# EAGLE board eTapper1main56 (EAGLE 8.6.3)
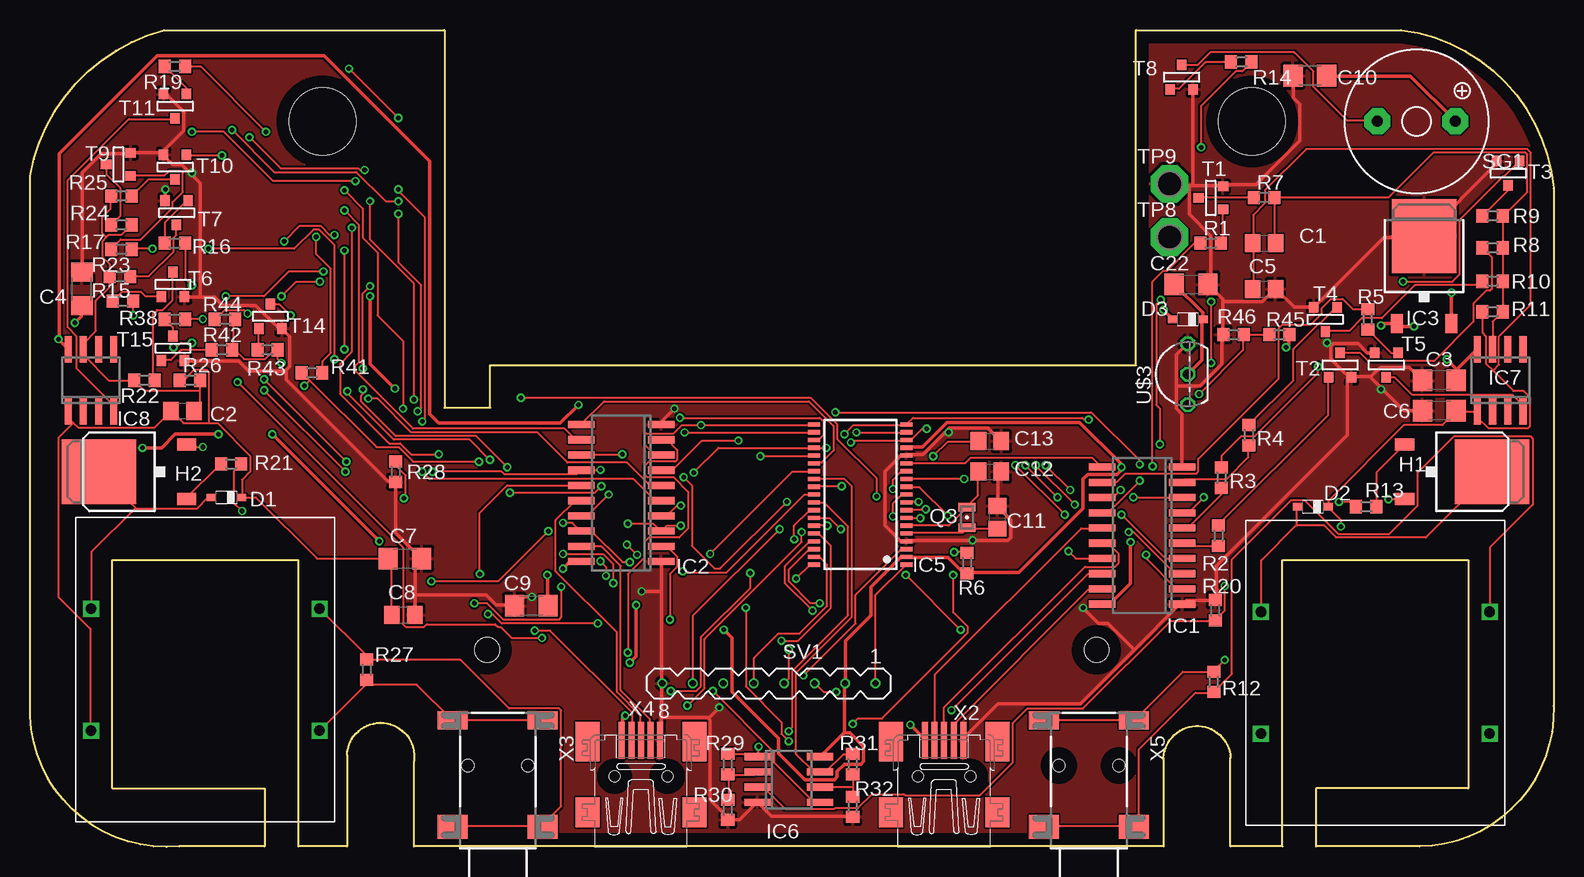
[diagram p0: board, top side]
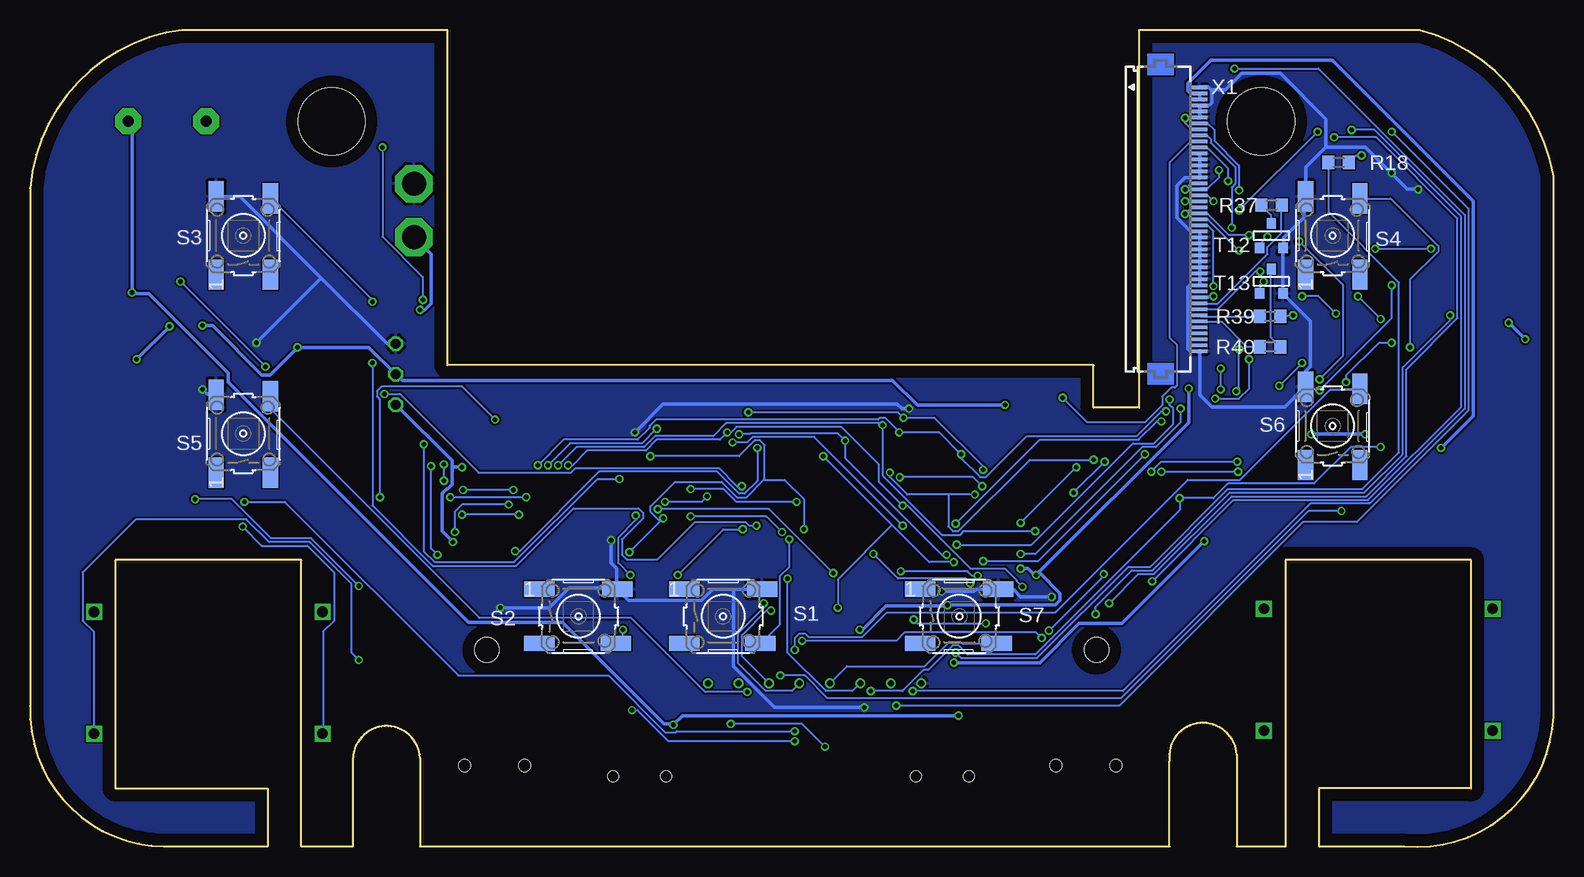
[diagram p1: board, bottom side, seen from below]

Size 127 x 68.12 mm. Coordinates in mm from the lower left corner, seen from the top.
Outline: 104.4,23.93 119.89,23.93 119.89,4.88 107.19,4.88 107.19,0.05 115.83,0.05 arc91 127,11.73 127,54.91 arc78 114.3,68.12 92.21,68.12 92.21,40.18 38.36,40.18 38.36,36.63 34.55,36.63 34.55,68.12 11.18,68.12 arc65 0,55.93 0,11.99 arc98 12.45,0.05 19.56,0.05 19.56,4.88 6.86,4.88 6.86,23.93 22.36,23.93 22.36,0.05 26.42,0.05 26.42,7.67 arc-185 32.01,7.16 32.01,0.05 94.49,0.05 94.49,7.42 arc-175 100.08,7.42 100.08,0.05 104.4,0.05 104.4,23.93
Copper layers (1*16): Top 0.035mm / dielectric 30mil / Bottom 0.035mm
Design rules "default *": minimum track width 6mil, minimum drill 15mil, track to track 6mil, track to pad 6mil, pad to pad 6mil, via to via 6mil, smd to smd 6mil, copper to edge 40mil, drill to drill 6mil, minimum pad ring 6mil, minimum via ring 6mil, stop-mask expansion 4mil, vias tented up to drill 0mil, thermal gap 10mil
Net classes: 1 GND: width 0.305 mm, clearance 0.152 mm; 2 BAT+: width 0.305 mm, clearance 0.152 mm; 3 +9V: width 0.305 mm, clearance 0.152 mm; 4 +3V: width 0.305 mm, clearance 0.152 mm; 5 VCC: width 0.305 mm, clearance 0.152 mm
Holes 5.59 mm at 24.39,60.5 101.86,60.5
Holes 2.03 mm at 38.1,16.43 88.9,16.43

## Footprints (pad centres in the part's own frame; a part is rotated, then mirrored left to right if it is on the bottom)
C0805 = smd 1.3 x 1.5: 1 -0.95,0; 2 0.95,0
C1206 = smd 1.6 x 1.8: 1 -1.4,0; 2 1.4,0
SOD323_ST = smd 0.8 x 0.6: A 1.25,0; C -1.25,0
XFMR = drill 0.889 square: P$1 -10.16,5.08; P$2 -10.16,-5.08; P$3 8.89,5.08; P$4 8.89,-5.08
D-PAK_TO252AA = smd 1 x 1.6: 1 -2.28,-4.8; 3 2.28,-4.8 | smd 5.4 x 6.2: 4 0,2.5
SO20 = smd 0.6 x 2.2: 1 -5.715,-3.33; 2 -4.445,-3.33; 3 -3.175,-3.33; 4 -1.905,-3.33; 5 -0.635,-3.33; 6 0.635,-3.33; 7 1.905,-3.33; 8 3.175,-3.33; 9 4.445,-3.33; 10 5.715,-3.33; 11 5.715,3.33; 12 4.445,3.33; 13 3.175,3.33; 14 1.905,3.33; 15 0.635,3.33; 16 -0.635,3.33; 17 -1.905,3.33; 18 -3.175,3.33; 19 -4.445,3.33; 20 -5.715,3.33
TO252 = smd 1 x 1.6: 1 -2.28,-4.8; 3 2.28,-4.8 | smd 5.4 x 6.2: 2 0,2.5
TSSOP38_R-PDSO-G38-DA = smd 0.35 x 1: 1 -5.85,-3.85; 2 -5.2,-3.85; 3 -4.55,-3.85; 4 -3.9,-3.85; 5 -3.25,-3.85; 6 -2.6,-3.85; 7 -1.95,-3.85; 8 -1.3,-3.85; 9 -0.65,-3.85; 10 0,-3.85; 11 0.65,-3.85; 12 1.3,-3.85; 13 1.95,-3.85; 14 2.6,-3.85; 15 3.25,-3.85; 16 3.9,-3.85; 17 4.55,-3.85; 18 5.2,-3.85; 19 5.85,-3.85; 20 5.85,3.85; 21 5.2,3.85; 22 4.55,3.85; 23 3.9,3.85; 24 3.25,3.85; 25 2.6,3.85; 26 1.95,3.85; 27 1.3,3.85; 28 0.65,3.85; 29 0,3.85; 30 -0.65,3.85; 31 -1.3,3.85; 32 -1.95,3.85; 33 -2.6,3.85; 34 -3.25,3.85; 35 -3.9,3.85; 36 -4.55,3.85; 37 -5.2,3.85; 38 -5.85,3.85
SO8 = smd 0.6 x 2.2: 1 -1.905,-2.6; 2 -0.635,-2.6; 3 0.635,-2.6; 4 1.905,-2.6; 5 1.905,2.6; 6 0.635,2.6; 7 -0.635,2.6; 8 -1.905,2.6
SO08 = smd 0.6 x 2.2: 1 -1.905,-2.6; 2 -0.635,-2.6; 3 0.635,-2.6; 4 1.905,-2.6; 5 1.905,2.6; 6 0.635,2.6; 7 -0.635,2.6; 8 -1.905,2.6
FC-12M = smd 0.7 x 1.4: 1 -0.85,0; 2 0.85,0
R0603 = smd 1 x 1.1: 1 -0.85,0; 2 0.85,0
B3F-10XX = smd 2.54 x 1.27: 1 -3.251,2.261; 2 3.251,2.261; 3 -3.251,-2.261; 4 3.099,-2.261
F/QMBIII = drill 0.914 pad 2.159 octagon: + 3.251,0; - -3.251,0
MA08-1 = drill 0.508: 1 -8.89,0; 2 -6.35,0; 3 -3.81,0; 4 -1.27,0; 5 1.27,0; 6 3.81,0; 7 6.35,0; 8 8.89,0
SOT-23 = smd 0.787 x 0.889: 1 0.025,-1.016; 2 -0.94,1.016; 3 0.991,1.016
P1-20 = drill 2.007 pad 3.15 octagon: TP 0,0
TO92- = drill 0.813 octagon: 1 -1.27,1.27; 2 1.27,1.27; 3 3.81,1.27
FH12-45S-0.5SH = smd 0.3 x 1.3: 1 -13,3.25; 2 -12.5,3.25; 3 -12,3.25; 4 -11.5,3.25; 5 -11,3.25; 6 -10.5,3.25; 7 -10,3.25; 8 -9.5,3.25; 9 -9,3.25; 10 -8.5,3.25; 11 -8,3.25; 12 -7.5,3.25; 13 -7,3.25; 14 -6.5,3.25; 15 -6,3.25; 16 -5.5,3.25; 17 -5,3.25; 18 -4.5,3.25; 19 -4,3.25; 20 -3.5,3.25; 21 -3,3.25; 22 -2.5,3.25; 23 -2,3.25; 24 -1.5,3.25; 25 -1,3.25; 26 -0.5,3.25; 27 0,3.25; 28 0.5,3.25; 29 1,3.25; 30 1.5,3.25; 31 2,3.25; 32 2.5,3.25; 33 3,3.25; 34 3.5,3.25; 35 4,3.25; 36 4.5,3.25; 37 5,3.25; 38 5.5,3.25; 39 6,3.25; 40 6.5,3.25; 41 7,3.25; 42 7.5,3.25; 43 8,3.25; 44 8.5,3.25; 45 9,3.25
32005-201 = smd 3.1 x 0.5: 1 3,1.6; 2 3,0.8; 3 3,0; 4 3,-0.8; 5 3,-1.6 | smd 2.5 x 2: M1 -3,-4.45; M2 -3,4.45 | smd 3.3 x 2: M3 2.9,4.45; M4 2.9,-4.45 | hole 0.9: 0,2.2; 0,-2.2
1503_02 = smd 2.5 x 1.5: 1 -3.75,-10.75; 4 3.75,-10.75 | smd 2.5 x 2: 2 -3.75,-1.9; 3 3.75,-1.9 | hole 1: -2.5,-7; 2.5,-7

## Placement (x,y rotation side)
C1  .01uF  [C0805]  102.87,50.34 0 top
C2  .01uF  [C0805]  12.7,36.37 0 top
C3  3.3 UF  [C1206]  117.48,38.91 180 top
C4  3.3 uF  [C1206]  4.32,46.53 90 top
C5  3.3uF  [C0805]  102.87,46.53 0 top
C6  220uF  [C1206]  117.48,36.37 180 top
C7  220uF  [C1206]  31.25,24.05 0 top
C8  3.3uF  [C0805]  31.12,19.35 0 top
C9  47uF  [C1206]  41.79,20.12 180 top
C10  47uF  [C1206]  106.68,64.31 180 top
C11  12pF  [C0805]  80.65,27.48 90 top
C12  12pF  [C0805]  80.01,31.29 0 top
C13  1 uF  [C0805]  80.01,33.83 0 top
C22  220uF  [C1206]  96.78,46.91 0 top
D1  BAT60J  [SOD323_ST]  16.39,29.13 180 top
D2  BAT60J  [SOD323_ST]  106.94,28.37 180 top
D3  BAT60J  [SOD323_ST]  96.52,43.99 180 top
DRILEGEND  [DRILEGEND]  -4.57,-8.42 0 top  (outside the outline)
F1  XFMR  [XFMR]  112.78,14.53 0 top
F2  XFMR  [XFMR]  15.24,14.78 0 top
H1  IRLR024N  [D-PAK_TO252AA]  119.38,31.29 270 top
H2  IRLR024N  [D-PAK_TO252AA]  8.26,31.29 90 top
IC1  74AC373  [SO20]  92.71,25.96 90 top
IC2  74AC373  [SO20]  49.28,29.51 90 top
IC3  LM2936DT-5.0  [TO252]  116.21,48.44 0 top
IC5  MSP430F2232IDA  [TSSOP38_R-PDSO-G38-DA]  69.22,29.39 90 top
IC6  AD8620R  [SO8]  63.25,5.64 270 top
IC7  LP2951M  [SO08]  122.56,38.91 0 top
IC8  LP2951M  [SO08]  5.08,38.91 0 top
Q3  FC-12M  [FC-12M]  78.11,27.48 90 top
R1  47K  [R0603]  98.43,50.34 0 top
R2  47K  [R0603]  99.06,25.96 90 top
R3  47K  [R0603]  99.32,30.78 90 top
R4  47K  [R0603]  101.6,34.34 90 top
R5  47K  [R0603]  111.51,43.99 270 top
R6  47K  [R0603]  78.11,23.67 270 top
R7  1K  [R0603]  102.87,54.15 0 top
R8  3K  [R0603]  121.92,49.96 0 top
R9  6K  [R0603]  121.92,52.63 0 top
R10  12K  [R0603]  121.92,47.17 0 top
R11  3K  [R0603]  121.92,44.63 0 top
R12  51K  [R0603]  98.68,13.77 90 top
R13  1K  [R0603]  111.38,28.37 0 top
R14  1K  [R0603]  100.97,65.45 180 top
R15  47K  [R0603]  7.75,45.52 180 top
R16  47K  [R0603]  12.07,50.34 180 top
R17  47K  [R0603]  7.62,49.83 180 top
R18  47K  [R0603]  17.91,57.07 0 bottom
R19  47K  [R0603]  12.07,65.07 180 top
R20  5 ohm  [R0603]  98.81,19.73 90 top
R21  1K  [R0603]  16.77,31.93 180 top
R22  1K  [R0603]  9.53,38.91 180 top
R23  3K  [R0603]  7.5,47.55 180 top
R24  6K  [R0603]  7.62,51.87 0 top
R25  12K  [R0603]  7.62,54.28 180 top
R26  3K  [R0603]  13.34,38.91 0 top
R27  51K  [R0603]  28.07,14.78 270 top
R28  5 ohm  [R0603]  30.48,31.29 270 top
R29  50K  [R0603]  58.17,6.91 90 top
R30  10K  [R0603]  58.17,3.1 90 top
R31  50K  [R0603]  68.58,6.91 90 top
R32  10K  [R0603]  68.58,3.35 90 top
R37  100  [R0603]  23.5,53.52 0 bottom
R38  100  [R0603]  12.07,43.99 0 top
R39  100  [R0603]  23.63,44.25 180 bottom
R40  100  [R0603]  23.63,41.71 180 bottom
R41  47K  [R0603]  23.5,39.55 0 top
R42  47K  [R0603]  16.01,41.45 180 top
R43  47K  [R0603]  19.82,41.45 180 top
R44  47K  [R0603]  16.26,43.99 180 top
R45  47K  [R0603]  104.14,42.72 0 top
R46  10K  [R0603]  100.33,42.72 0 top
S1  [B3F-10XX]  69.22,19.23 0 bottom
S2  [B3F-10XX]  81.28,19.23 0 bottom
S3  [B3F-10XX]  109.22,50.98 90 bottom
S4  [B3F-10XX]  18.42,50.98 90 bottom
S5  [B3F-10XX]  109.22,34.47 90 bottom
S6  [B3F-10XX]  18.42,35.1 90 bottom
S7  [B3F-10XX]  49.53,19.23 0 bottom
SG1  F/QMBIII  [F/QMBIII]  115.57,60.5 0 top
SV1  100mil  [MA08-1]  61.6,13.64 180 top
T1  2N3904  [SOT-23]  98.43,54.15 270 top
T2  2N3904  [SOT-23]  109.22,40.18 180 top
T3  2N3904  [SOT-23]  123.19,56.18 0 top
T4  2N3904  [SOT-23]  107.95,43.99 0 top
T5  2N3904  [SOT-23]  113.03,40.18 0 top
T6  2N3904  [SOT-23]  11.94,46.91 180 top
T7  2N3904  [SOT-23]  12.2,52.88 0 top
T8  2N3904  [SOT-23]  96.02,64.18 180 top
T9  2N3904  [SOT-23]  7.37,56.95 270 top
T10  2N3904  [SOT-23]  12.07,56.69 0 top
T11  2N3904  [SOT-23]  12.07,61.77 0 top
T12  2N3904  [SOT-23]  23.5,50.98 180 bottom
T13  2N3904  [SOT-23]  23.5,47.17 180 bottom
T14  2N3904  [SOT-23]  20.07,44.25 180 top
T15  2N3904  [SOT-23]  11.94,41.58 180 top
TP8  TPSPAD1-20  [P1-20]  95,50.85 0 top
TP9  TPSPAD1-20  [P1-20]  95,55.29 0 top
U$3  MCP1702  [TO92-]  95.25,40.69 270 top
X1  FH12-45S-0.5SH  [FH12-45S-0.5SH]  32.77,50.34 270 bottom
X2  MINI-USB-SCHIELD-32005-201  [32005-201]  76.2,5.89 90 top
X3  1503_02A  [1503_02]  38.99,-0.2 180 top
X4  MINI-USB-SCHIELD-32005-201  [32005-201]  50.93,5.89 90 top
X5  1503_02A  [1503_02]  88.27,-0.2 180 top

## Library data of the parts
C1-C13 C22 = rcl; SPICEPREFIX: C
D1-D3 = diode
DRILEGEND = drilegend
F1 F2 = XFMR1
H1 H2 = IRLR024N
IC1 IC2 = 74373_SO20
IC3 = national-semiconductor; MF: NATIONAL SEMICONDUCTOR; MPN: LM2936DT-5.0/NOPB; OC_FARNELL: 1286864; OC_NEWARK: 41K4501
IC5 = texas; MPN: MSP430F2232IDA; OC_FARNELL: 1610178; OC_NEWARK: 28M6312
IC6 = analog-devices; MF: ALTERA CORPORATION; MPN: AD8620ARZ; OC_FARNELL: 9994386; OC_NEWARK: 59K6972
IC7 IC8 = national-semiconductor; MF: FAIRCHILD SEMICONDUCTOR; MPN: LP2951CM; OC_FARNELL: 9488561; OC_NEWARK: 78K6014
Q3 = crystal
R1-R32 R37-R46 = resistor
S1-S7 = switch-omron; MPN: B3F-1000; OC_FARNELL: 176432; OC_NEWARK: 36M3542
SG1 = buzzer; OC_FARNELL: unknown; OC_NEWARK: unknown
SV1 = eTapper1main39; OC_FARNELL: unknown; OC_NEWARK: unknown
T1-T15 = zetex; MPN: DSS20201L-7; OC_FARNELL: 1710688; OC_NEWARK: 25R4555
TP8 TP9 = testpad
U$3 = mcp1702
X1 = con-hirose; OC_FARNELL: unknown; OC_NEWARK: unknown
X2 X4 = con-cypressindustries; OC_FARNELL: unknown; OC_NEWARK: unknown
X3 X5 = 1503_02Astereojacks

## Nets
+3V [+3V]: C9.1 IC1.20 IC2.20 IC5.2 IC5.16 IC6.8 R6.2 SV1.2 U$3.3 X1.2 X1.3 X1.36
+9V [+9V]: C3.1 C4.1 C22.1 D3.C IC3.1 IC7.8 IC8.8 R45.2 U$3.2
/LCS: IC5.8 X1.8
/RST: C13.1 IC5.7 R6.1 SV1.7
BAT+ [BAT+]: D3.A TP8.TP
GND [GND]: C3.2 C4.2 C5.2 C6.2 C7.2 C8.2 C9.2 C10.2 C11.2 C12.2 C13.2 C22.2 IC1.1 IC1.10 IC2.1 IC2.10 IC3.2 IC5.4 IC5.15 IC6.4 R20.2 R28.2 R30.1 R32.1 R46.1 S1.2 S2.2 S3.2 S4.2 S5.2 S6.2 S7.2 SV1.8 T1.2 T2.2 T3.2 T4.2 T5.2 T6.2 T7.2 T8.2 T9.2 T10.2 T11.2 T12.2 T13.2 T14.2 T15.2 TP9.TP U$3.1 X1.1 X1.4 X1.5 X1.6 X1.12 X1.13 X1.14 X1.15 X1.16 X1.25 X1.26 X1.27 X1.28 X1.29 X1.30 X1.31 X1.32 X1.33 X1.34 X1.45 X2.5 X4.5
IO1_0: IC5.31 S1.4
IO1_1: IC5.32 S2.4
IO1_2: IC5.33 S3.4
IO1_3: IC5.34 S4.4
IO4_0: IC1.3 IC2.3 IC5.17 X1.17
IO4_1: IC1.4 IC2.4 IC5.18 X1.18
IO4_2: IC1.7 IC2.7 IC5.19 X1.19
IO4_3: IC1.8 IC2.8 IC5.20 X1.20
IO4_4: IC1.13 IC2.13 IC5.21 X1.21
IO4_5: IC1.14 IC2.14 IC5.22 X1.22
IO4_6: IC1.17 IC2.17 IC5.23 X1.23
IO4_7: IC1.18 IC2.18 IC5.24 X1.24
LADC: IC5.11 IC6.1 R29.2
LCLOCK: IC1.16 X2.3
LCLR: IC1.19 X2.4
LD_/C: IC5.29 X1.9
LDIN: IC1.15 X2.2
LEDK1: R37.2 X1.37
LEDK2: R38.2 X1.38
LEDK3: R39.2 X1.39
LEDK4: R40.2 X1.40
LHVTRIG: IC5.30 R13.1
LLED: IC5.13 R41.1 R42.1 R43.1 R44.1
LNC1: X1.41
LNC2: X1.42
LNC3: X1.43
LNC4: X1.44
LOPA: H1.3 IC6.3 R20.1
LRD: IC5.10 X1.11
LRESET: IC5.26 X1.7
LSDO: X1.35
LTS+: F1.P$4 R12.2 X5.1 X5.4
LTS-: F1.P$3 R12.1 X5.2 X5.3
LVSEL: IC1.11 IC5.14
LWR: IC5.9 X1.10
N$1: IC1.2 R1.1
N$2: IC1.5 R2.1
N$3: IC1.6 R3.1
N$4: IC1.9 R4.1
N$5: IC1.12 R5.1
N$6: SG1.- T8.1
N$7: R4.2 T4.3
N$8: R5.2 T5.3
N$9: D2.A F1.P$1 H1.4
N$10: R7.1 T1.1
N$11: R8.1 T2.1
N$12: R9.1 T3.1
N$13: R1.2 T1.3
N$14: R2.2 T2.3
N$15: R3.2 T3.3
N$16: R10.1 T4.1
N$17: C1.2 IC7.7 R7.2 R8.2 R9.2 R10.2 R11.2
N$18: C1.1 C5.1 C6.1 D2.C F1.P$2 IC7.1 R11.1
N$19: D1.A F2.P$1 H2.4
N$20: IC2.2 R15.1
N$21: H1.1 R13.2
N$22: R14.2 T8.3
N$24: IC2.5 R16.1
N$25: IC2.6 R17.1
N$26: IC2.9 R18.1
N$27: IC2.12 R19.1
N$28: R44.2 T13.3
N$29: R15.2 T6.3
N$30: R16.2 T7.3
N$31: R17.2 T9.3
N$32: R18.2 T10.3
N$33: R19.2 T11.3
N$35: R22.1 T6.1
N$36: R23.1 T7.1
N$37: R24.1 T9.1
N$38: R25.1 T10.1
N$39: C2.2 IC8.7 R22.2 R23.2 R24.2 R25.2 R26.2
N$40: C2.1 C7.1 C8.1 D1.C F2.P$2 IC8.1 R26.1
N$41: R37.1 T12.1
N$42: H2.1 R21.2
N$43: R38.1 T15.1
N$44: R39.1 T14.1
N$45: IC7.4 T5.1
N$46: R40.1 T13.1
N$47: IC8.4 T11.1
N$48: R43.2 T14.3
N$49: R41.2 T12.3
N$50: R42.2 T15.3
N$52: IC6.6 R31.1 R32.2
N$54: IC6.2 R29.1 R30.2
RADC: IC5.27 IC6.7 R31.2
RCLOCK: IC2.16 X4.3
RCLR: IC2.19 X4.4
RDIN: IC2.15 X4.2
RHVTRIG: IC5.3 R21.1
ROPA: H2.3 IC6.5 R28.1
RTS+: F2.P$4 R27.2 X3.1 X3.4
RTS-: F2.P$3 R27.1 X3.2 X3.3
RVSEL: IC2.11 IC5.25
SPKR: IC5.12 R14.1
TCK: IC5.35 S5.4 SV1.3
TDI: IC5.37 S7.4 SV1.5
TDO: IC5.38 SV1.6
TEST: IC5.1 SV1.1
TMS: IC5.36 S6.4 SV1.4
VBAT: IC5.28 R45.1 R46.2
VCC [VCC]: C10.1 IC3.3 SG1.+ X2.1 X4.1
XIN: C12.1 IC5.6 Q3.2
XOUT: C11.1 IC5.5 Q3.1

## Tracks (layer width: path | path; a pad name or v marks a point on that pad's centre or on a via)
+3V  (via drill 0.38)
  Top 0.305: IC1.20 90,20.24 91.75,22 v91.75,25.42 | 67.9,9.57 67.9,13.61 SV1.2 67.97,13.77 67.97,17.19 70.11,19.33 70.11,21.69 72.55,24.13 72.93,24.13 IC5.2 73.08,24.13 76.51,24.13 77.8,22.83 78.11,22.83 R6.2 78.19,22.91 82.45,22.91 87.79,28.24 87.79,30.68 88.17,31.06 90.61,31.06 90.83,31.29 90.83,31.67 | 67.9,9.57 65.92,7.59 IC6.8 | 90.83,31.67 90.83,32.05 87.48,35.41 76.43,35.41 74.38,33.35 73.08,33.35 IC5.16 | v90.99,31.67 90.83,31.67 | v28.35,45.92 28.35,40.28 v30.41,38.23 | v43.13,22.68 43.13,20.17 C9.1 | v9.38,33.27 10.98,33.27 12.12,34.42 v15.7,34.42 | v29.11,25.5 v20.2,34.42 | v49.99,15.37 50.53,15.9 v50.53,20.17 | v44.43,23.21 44.96,23.75 45.88,23.75 IC2.20 | v57.84,18.11 58.53,17.42 58.53,12.93 62.41,9.04 62.41,7.82 64.62,5.61 67.06,5.61 67.29,5.84 67.29,6.3 67.9,6.91 69.27,6.91 69.5,7.14 69.5,8.36 68.36,9.5 67.97,9.5 67.9,9.57
  Bottom 0.305: v91.75,25.42 92.66,26.34 92.66,29.46 92.28,29.84 92.21,29.84 91.83,30.22 91.83,31.67 | 91.83,31.67 91.83,32.21 96.47,36.85 U$3.3 | v90.99,31.67 91.83,31.67 | X1.3 29.49,62.38 29.49,62.84 X1.2 29.65,62.84 30.26,62.84 30.48,63.07 30.48,63.68 28.58,65.58 18.44,65.58 6.71,53.85 6.71,35.94 v9.38,33.27 | v28.35,45.92 28.43,45.85 29.49,45.85 X1.36 | v30.41,38.23 30.41,35.41 v43.13,22.68 | v20.2,34.42 v15.7,34.42 | v29.11,25.5 35.97,18.64 39.55,18.64 42.83,15.37 v49.99,15.37 | v43.13,22.68 42.83,22.83 41.15,21.16 41.15,20.55 41.53,20.17 v50.53,20.17 50.6,20.09 55.63,20.09 57.61,18.11 v57.84,18.11 | v44.43,23.21 43.82,23.21 43.29,22.68 v43.13,22.68
+9V  (via drill 0.38)
  Top 0.305: v3.74,43.71 4.27,44.25 4.27,45.08 C4.1 | IC8.8 3.13,41.58 v2.37,42.34 2.44,42.42 2.44,57.81 10.6,65.96 24.54,65.96 33.3,57.2 33.3,36.09 34.07,35.33 44.2,35.33 v45.72,36.85 | 118.95,39.83 118.95,38.91 C3.1 | 118.95,39.83 120.63,41.5 IC7.8 | C22.1 95.41,46.91 97.77,44.55 97.77,44.02 D3.C 97.69,43.86 97.69,40.59 U$3.2 | v104.7,41.65 104.93,41.88 104.93,42.72 R45.2 | v112.63,43.48 112.78,43.64 IC3.1 114.08,43.64 114.3,43.41 v115.37,43.41 | v118.11,40.66 118.95,39.83
  Bottom 0.305: v2.37,42.34 v3.74,43.71 | v112.63,43.48 111.79,43.48 107.68,39.37 106.99,39.37 v104.7,41.65 98.76,41.65 U$3.2 96.4,39.37 95.94,38.91 55.1,38.91 53.04,36.85 v45.72,36.85 | v115.37,43.41 v118.11,40.66
/LCS  (via drill 0.38)
  Top 0.152: v74.68,28.17 74.6,28.09 73.08,28.09 IC5.8 | v60.05,22.83 60.05,21.61 55.94,17.5 55.94,13.38 55.55,13 v53.42,13 | v30.71,60.78 v26.6,64.9
  Bottom 0.152: v74.68,28.17 65.38,28.17 v60.05,22.83 | v53.42,13 35.89,13 20.27,28.62 15.32,28.62 7.4,36.55 7.4,52.7 19.59,64.9 v26.6,64.9 | v30.71,60.78 30.71,60.4 30.18,59.87 29.57,59.87 X1.8
/RST  (via drill 0.38)
  Top 0.152: v74.22,27.41 73.08,27.41 IC5.7 | v77.04,24.59 78.11,24.59 R6.1 | v75.29,32.59 76.51,33.81 79.02,33.81 C13.1 | SV1.7 55.25,19.25 v62.49,26.49
  Bottom 0.152: v77.04,24.59 74.49,27.14 | 74.49,27.14 v74.22,27.41 | v75.29,32.59 67.9,32.59 66.6,33.88 66.15,33.88 65.77,33.5 65.77,30.68 65.8,30.64 | 65.8,30.64 67.29,29.16 68.05,29.16 69.35,30.45 73.23,30.45 75.29,28.4 75.29,27.94 74.49,27.14 | v62.49,26.49 62.49,29.01 64.09,30.61 65.77,30.61 65.8,30.64
BAT+  (via drill 0.38)
  Top 0.305: v94.49,44.78 95.25,44.02 D3.A
  Bottom 0.305: v94.49,44.78 94.11,44.78 93.58,45.31 93.58,49.43 TP8.TP
GND  (via drill 0.38)
  Top 0.305: v11.28,54.84 11.28,53.92 T7.2 | R32.1 68.58,2.56 61.8,2.56 60.74,3.63 IC6.4 60.58,3.71 59.14,2.26 58.22,2.26 R30.1 58.22,2.41 56.7,3.94 56.7,10.57 56.54,10.72 | 52.66,10.79 52.66,9.04 52.58,8.96 X4.5 | 52.66,10.79 52.66,13.61 SV1.8 52.66,13.77 52.66,21.31 | 52.66,21.31 52.66,23.75 IC2.1 | 52.66,21.31 v50.98,21.31 | 56.54,10.72 56.47,10.79 52.66,10.79 | 32.08,21 32.08,23.52 32.54,23.98 C7.2 32.62,24.05 30.48,26.19 R28.2 30.41,30.53 29.8,30.53 21.34,38.99 21.34,39.6 21.26,39.67 | 32.08,21 32.08,19.4 C8.2 | 32.08,21 38.03,21 38.87,20.17 40.31,20.17 C9.2 40.47,20.24 41.08,20.85 v41.84,20.85 | 21.26,39.67 18.22,39.67 17.38,40.51 12.88,40.51 T15.2 | 21.26,39.67 21.65,40.05 21.65,42.57 21.04,43.18 T14.2 20.88,43.25 20.73,43.25 18.83,45.16 16.08,45.16 15.4,45.85 14.18,45.85 | 14.18,45.85 12.88,45.85 T6.2 | T10.2 11.13,57.73 10.98,57.89 T9.2 8.31,57.81 5.95,57.81 4.35,56.21 4.35,47.98 C4.2 | T11.2 11.13,62.76 11.36,62.76 12.81,61.31 12.81,59.71 11.05,57.96 T10.2 | 14.18,45.85 14.18,55.37 13.42,56.13 | 13.42,56.13 12.65,56.89 11.89,56.89 11.21,57.58 T10.2 | v13.49,56.21 13.42,56.13 | C12.2 80.93,31.29 80.7,31.06 80.7,28.47 C11.2 80.7,28.32 81.77,27.25 81.77,25.81 81.54,25.58 v78.57,25.58 73.16,25.58 IC5.4 73,25.5 72.55,25.5 71.25,26.8 71.25,31.29 72.55,32.59 73,32.59 IC5.15 73.16,32.74 74.45,32.74 76.43,34.72 | 76.43,34.72 76.66,34.95 79.86,34.95 80.93,33.88 C13.2 | v53.73,36.55 52.66,35.48 52.66,35.25 IC2.10 | v76.59,34.57 76.43,34.72 | 92.05,16.43 87.56,11.94 80.7,11.94 77.73,8.96 X2.5 | 92.05,16.43 95.79,20.17 95.94,20.17 IC1.1 96.09,20.24 96.4,20.55 98.76,20.55 R20.2 98.91,20.7 98.91,23.44 109.81,34.34 109.81,39.14 T2.2
  Top 0.305: 96.63,55.14 95.18,55.14 95.03,55.29 TP9.TP | 96.63,55.14 96.93,55.14 | 96.93,55.14 99.45,55.14 T1.2 99.52,55.22 102.19,55.22 105.85,58.88 105.85,61.92 105.31,62.46 105.31,64.29 C10.2 | 96.93,55.14 96.93,63.14 T8.2 | T3.2 122.23,57.2 122.23,56.97 116.21,50.95 IC3.2 116.13,50.8 112.86,50.8 107.14,45.08 T4.2 105.39,45.01 103.87,46.53 C5.2 103.71,46.46 102.72,45.46 99.45,45.46 | 99.45,45.46 99.45,45.69 98.23,46.91 C22.2 98.3,46.99 98.45,47.14 98.45,50.95 96.63,52.78 96.63,55.14 | 99.45,45.46 99.45,42.72 R46.1 99.37,42.65 99.37,40.28 97.54,38.45 95.56,38.45 | 111.79,39.22 110.19,39.22 T2.2 | 111.79,39.22 112.55,39.98 114.99,39.98 116.06,38.91 C3.2 | T5.2 111.49,41.2 110.72,41.96 108.67,41.96 108.44,41.73 | 108.44,41.73 108.44,40.66 109.88,39.22 110.04,39.22 T2.2 | 112.7,38.23 111.79,39.14 111.79,39.22 | 112.7,38.23 114.53,36.4 116.06,36.4 C6.2 | v112.63,38.15 112.7,38.23 | 95.56,38.45 95.56,41.05 96.47,41.96 U$3.1 | 95.56,38.45 95.56,36.55 96.02,36.09 96.02,31.67 IC1.10 | v108.13,42.04 108.44,41.73 | v87.79,19.94 89.08,18.64 89.84,18.64 92.05,16.43 | v57.46,11.63 56.54,10.72
  Bottom 0.305: X1.12 29.49,57.81 29.49,57.43 X1.13 29.49,57.28 29.49,56.97 X1.14 29.49,56.82 29.49,56.44 X1.15 29.49,56.29 29.49,55.9 X1.16 29.65,55.83 30.71,55.83 31.4,55.14 31.4,52.48 30.26,51.33 29.65,51.33 X1.25 29.49,51.33 29.49,50.95 X1.26 29.49,50.8 29.49,50.42 X1.27 29.49,50.34 29.49,49.96 X1.28 29.49,49.81 29.49,49.43 X1.29 29.49,49.27 29.49,48.97 X1.30 29.49,48.82 29.49,48.44 X1.31 29.49,48.28 29.49,47.98 X1.32 29.49,47.83 29.49,47.45 X1.33 29.49,47.29 29.49,46.99 X1.34 29.57,46.84 30.33,46.84 30.48,46.68 30.48,41.5 30.33,41.35 29.57,41.35 X1.45 29.49,41.2 29.49,37.69 28.5,36.7 22.41,36.7 20.81,38.3 S6.2 20.65,38.38 20.65,39.67 20.27,40.05 20.27,43.86 T13.2 T12.2 22.48,50.04 22.48,50.8 20.81,52.48 20.81,54.15 S4.2 20.65,54.23 20.65,56.67 18.98,58.34 | X1.6 29.49,60.86 29.49,61.31 X1.5 29.49,61.47 29.49,61.77 X1.4 29.34,61.77 28.81,61.77 28.5,62.08 28.5,63.07 | 28.5,63.07 28.81,63.37 29.49,63.37 X1.1 | v11.28,54.84 12.2,54.84 13.53,56.17 | 13.53,56.17 15.7,58.34 18.98,58.34 | 18.98,58.34 18.98,60.7 22.79,64.51 25.99,64.51 27.36,63.14 28.43,63.14 28.5,63.07 | v50.98,21.31 48.32,21.31 48.16,21.46 46.33,21.46 S7.2 46.18,21.39 44.96,21.39 44.43,20.85 v41.84,20.85 | v13.49,56.21 13.53,56.17 | 68.36,21.46 70.11,21.46 71.02,20.55 77.12,20.55 78.03,21.46 S2.2 | 68.36,21.46 65.99,21.46 S1.2 | v53.73,36.55 54.34,36.55 54.72,36.93 74.22,36.93 v76.59,34.57 | v78.57,25.58 78.57,23.67 78.11,23.21 78.11,21.61 S2.2 | v112.63,38.15 112.25,37.77 111.49,37.77 S5.2 | S3.2 109.5,54.23 102.72,47.45 | 102.72,47.45 97.24,41.96 U$3.1 | 102.72,47.45 v108.13,42.04
  Bottom 0.305: v87.79,19.94 83.75,19.94 82.07,21.61 78.26,21.61 S2.2 | v57.46,11.63 64.93,11.63 68.36,15.06 68.36,21.46
  pour Top: 0,68.63 127,68.63 127,0.05 0,0.05
  pour Bottom: 0,68.63 127,68.63 127,0.05 0,0.05
IO1_0  (via drill 0.38)
  Top 0.152: v63.71,25.65 63.71,26.8 64.93,28.01 65.31,28.01 IC5.31
  Bottom 0.152: v63.71,25.65 63.71,23.37 64.47,22.6 64.47,18.57 66.07,16.97 S1.4
IO1_1  (via drill 0.38)
  Top 0.152: v67.59,26.49 66.68,27.41 65.38,27.41 IC5.32 | v77.58,18.11 v73,22.68
  Bottom 0.152: v67.59,26.49 69.19,26.49 v73,22.68 | v77.58,18.11 77.58,17.58 S2.4
IO1_2  (via drill 0.38)
  Top 0.152: v66.45,26.8 IC5.33 | v98.45,45.46 v98.45,40.36
  Bottom 0.152: v66.45,26.8 67.06,26.8 67.37,27.1 71.56,27.1 74.68,23.98 77.27,23.98 77.65,24.36 77.65,25.65 75.9,27.41 75.9,27.86 76.28,28.24 81.69,28.24 86.49,23.44 93.43,23.44 98.45,28.47 v98.45,40.36 | v98.45,45.46 98.45,45.62 106.91,54.08 S3.4
IO1_3  (via drill 0.38)
  Top 0.152: v62.64,17.19 64.01,17.19 66.76,19.94 66.76,25.12 65.77,26.11 65.38,26.11 IC5.34 | v42.68,17.42 40.16,17.42 39.25,18.34 39.02,18.34 38.79,18.57 33.08,18.57 32.85,18.34 31.32,18.34 31.09,18.57 31.09,24.97 v17.3,38.76 | v13.49,42.04 12.58,42.04 12.2,41.65 v11.97,41.65
  Bottom 0.152: v62.64,17.19 54.79,17.19 54.11,17.88 43.13,17.88 v42.68,17.42 | v17.3,38.76 17.3,39.29 14.56,42.04 v13.49,42.04 | v11.97,41.65 11.97,47.29 9.61,49.66 9.61,50.11 13.57,54.08 S4.4
IO4_0  (via drill 0.38)
  Top 0.152: v68.43,33.73 68.58,33.88 73,33.88 IC5.17 73.08,33.96 73.46,33.96 74.38,34.87 v74.76,34.87 | v54.26,26.8 53.12,26.8 52.66,26.34 IC2.3 52.58,26.34 51.97,26.95 v49.84,26.95 | v30.71,54.84 30.71,54.68 32.92,52.48 32.92,35.71 v32.69,35.48 | v91.6,26.26 91.98,26.26 95.41,22.83 96.02,22.83 IC1.3 | v83.82,31.82 v87.1,28.55
  Bottom 0.152: v68.43,33.73 67.21,33.73 66.76,34.19 61.65,34.19 v54.26,26.8 | v30.71,54.84 30.26,55.29 29.57,55.29 X1.17 | v32.69,35.48 33.08,35.48 34.6,33.96 42.83,33.96 v49.84,26.95 | v91.6,26.26 91.6,27.94 90.99,28.55 v87.1,28.55 | v83.82,31.82 82,33.65 75.98,33.65 v74.76,34.87
IO4_1  (via drill 0.38)
  Top 0.152: v68.89,34.57 73,34.57 IC5.18 | v54.26,28.47 53.95,28.47 53.12,27.63 52.66,27.63 IC2.4 | v27.89,56.44 27.51,56.44 27.36,56.59 20.88,56.59 v18.29,59.18 | v37.04,20.32 38.1,20.32 39.48,18.95 44.05,18.95 44.28,19.18 v44.28,21.69 | IC1.4 94.64,24.05 v90.99,27.71 | v82.15,31.82 v86.26,27.71
  Bottom 0.152: v27.89,56.44 27.89,55.83 28.81,54.91 29.49,54.91 X1.18 | v18.29,59.18 14.79,59.18 8.01,52.4 8.01,44.09 12.27,39.83 12.27,32.59 15.63,29.23 26.83,29.23 33.3,22.76 34.6,22.76 v37.04,20.32 | v44.28,21.69 44.73,22.15 44.73,22.22 45.72,23.21 48.62,23.21 53.88,28.47 v54.26,28.47 56.24,30.45 56.24,31.9 59.36,35.03 68.13,35.03 68.58,34.57 v68.89,34.57 69.5,33.96 74.76,33.96 75.67,33.04 80.55,33.04 81.77,31.82 v82.15,31.82 | v86.26,27.71 v90.99,27.71
IO4_2  (via drill 0.38)
  Top 0.152: v67.9,34.42 68.66,35.18 73,35.18 IC5.19 73.08,35.25 73.61,35.79 87.71,35.79 87.86,35.63 v88.24,35.63 | v59.06,33.88 56.01,33.88 53.57,31.44 52.66,31.44 IC2.7 | v28.35,53.85 28.35,50.65 32.01,46.99 v32.01,37.31 | v50.6,24.36 v49.76,25.2 | IC1.7 96.55,27.86 v97.85,29.16
  Bottom 0.152: v67.9,34.42 66.98,34.42 66.91,34.49 59.67,34.49 v59.06,33.88 59.06,32.43 50.98,24.36 v50.6,24.36 | v28.35,53.85 28.81,54.3 29.49,54.3 X1.19 | v32.01,37.31 32.01,36.85 31.7,36.55 31.7,35.25 33.3,33.65 35.06,33.65 43.51,25.2 v49.76,25.2 | v97.85,29.16 97.85,37.31 98.07,37.54 98.07,38 97.69,38.38 90.99,38.38 v88.24,35.63
IO4_3  (via drill 0.38)
  Top 0.152: IC5.20 65.31,35.18 v55.94,35.18 54.34,35.18 53.65,34.49 51.36,34.49 51.21,34.34 51.21,33.58 52.05,32.74 52.58,32.74 IC2.8 | v30.71,53.85 29.65,53.85 27.21,56.29 20.35,56.29 v16.84,59.79 | v33.46,22.15 39.02,22.15 v43.21,26.34 | v91.98,29.16 96.02,29.16 IC1.8 | v82.99,31.82 v85.65,29.16
  Bottom 0.152: v30.71,53.85 29.57,53.85 X1.20 | v16.84,59.79 14.94,59.79 7.7,52.55 7.7,36.7 15.47,28.93 26.67,28.93 v33.46,22.15 | v43.21,26.34 49.15,26.34 49.46,26.03 50.98,26.03 55.94,30.99 v55.94,35.18 56.09,35.33 68.97,35.33 70.03,34.26 74.91,34.26 75.82,33.35 81.46,33.35 v82.99,31.82 | v85.65,29.16 v91.98,29.16
IO4_4  (via drill 0.38)
  Top 0.152: v54.56,34.57 65.31,34.57 IC5.21 | v49.38,32.74 45.95,32.74 IC2.13 | v30.71,52.78 30.71,48.74 32.62,46.84 32.62,36.63 v32.31,36.32 | v90.91,29.77 90.3,29.16 89.39,29.16 IC1.13 | v84.66,31.82 v86.72,29.77
  Bottom 0.152: 54.49,34.57 51.21,34.57 v49.38,32.74 49.38,32.43 47.78,30.83 47.32,30.83 43.9,34.26 34.75,34.26 32.69,36.32 v32.31,36.32 | v30.71,52.78 30.18,53.31 29.57,53.31 X1.21 | v86.72,29.77 v90.91,29.77 | v84.66,31.82 82.53,33.96 76.36,33.96 75.37,34.95 75.37,35.1 74.83,35.63 56.32,35.63 56.16,35.79 55.71,35.79 54.49,34.57 | 54.49,34.57 v54.56,34.57
IO4_5  (via drill 0.38)
  Top 0.152: v54.18,35.79 65.84,35.79 66.15,35.48 66.15,34.34 65.77,33.96 65.38,33.96 IC5.22 | v47.55,31.44 45.95,31.44 IC2.14 45.88,31.37 45.57,31.06 39.55,31.06 39.32,31.29 v33.53,31.29 | v25.38,51.03 25,51.03 24.24,51.79 22.48,51.79 v21.19,50.49 | v26.37,32.13 v19.51,38.99 | IC1.14 89.84,27.86 v92.51,30.53 | v92.51,31.9 92.51,32.21 88.47,36.24 v67.14,36.24
  Bottom 0.152: v47.55,31.44 47.55,31.75 51.59,35.79 v54.18,35.79 54.64,36.24 v67.14,36.24 | v25.38,51.03 27.06,51.03 28.81,52.78 29.49,52.78 X1.22 | v21.19,50.49 17.53,46.84 17.53,40.97 v19.51,38.99 | v26.37,32.13 32.69,32.13 v33.53,31.29 | v92.51,31.9 v92.51,30.53
IO4_6  (via drill 0.38)
  Top 0.152: v55.33,31.22 57.38,33.27 65.31,33.27 IC5.23 65.38,33.27 v66.37,33.27 | v48.24,29.39 46.49,27.63 45.95,27.63 IC2.17 | v26.22,41.5 v26.22,49.73 | v26.45,38 26.45,37.84 30.33,33.96 36.66,33.96 v38.33,32.28 | IC1.17 87.18,24.05 v86.57,24.66
  Bottom 0.152: v55.33,31.22 55.33,30.83 53.88,29.39 50.45,29.39 | v48.24,29.39 50.45,29.39 | v26.22,49.73 28.81,52.32 29.49,52.32 X1.23 | v26.22,41.5 26.22,38.23 v26.45,38 | v38.33,32.28 43.67,32.28 49.61,26.34 50.07,26.34 50.45,26.72 50.45,29.39 | v86.57,24.66 86.19,24.66 79.56,31.29 69.73,31.29 67.9,29.46 67.44,29.46 66.37,30.53 v66.37,33.27
IO4_7  (via drill 0.38)
  Top 0.152: v60.89,32.59 65.31,32.59 IC5.24 | v49.99,23.75 49.38,23.75 46.79,26.34 IC2.18 45.88,26.34 45.19,27.02 v44.43,27.02 | v28.35,46.76 27.74,46.15 v27.74,39.9 | v27.74,38.15 27.74,37.77 27.59,37.62 27.59,37.16 30.48,34.26 37.19,34.26 v39.78,31.67 | v76.81,11.4 88.17,22.76 89.31,22.76 IC1.18 | v63.25,8.81 62.64,9.42 62.64,10.41 59.67,13.38 v59.67,19.94
  Bottom 0.152: 55.14,26.83 52.05,23.75 v49.99,23.75 | 55.14,26.83 v60.89,32.59 | v28.35,46.76 28.35,51.33 28.81,51.79 29.49,51.79 X1.24 | v27.74,38.15 v27.74,39.9 | v44.43,27.02 v39.78,31.67 | v76.81,11.4 76.36,11.4 73.77,8.81 v63.25,8.81 | v59.67,19.94 59.67,22.3 55.14,26.83
LADC  (via drill 0.38)
  Top 0.152: v76.51,27.63 74.15,30 73.08,30 IC5.11 | v76.97,22.68 76.97,19.56 78.19,18.34 78.19,17.88 71.02,10.72 69.04,10.72 v68.58,10.26 | v60.74,8.36 60.74,7.67 60.66,7.59 IC6.1 60.58,7.59 60.43,7.75 58.22,7.75 R29.2
  Bottom 0.152: v76.51,27.63 76.51,27.25 77.96,25.81 77.96,23.67 v76.97,22.68 | v68.58,10.26 62.64,10.26 v60.74,8.36
LCLOCK
  Top 0.152: X2.3 76.2,11.63 87.94,23.37 90.45,23.37 90.76,23.67 90.76,24.43 89.92,25.27 89.39,25.27 IC1.16
LCLR
  Top 0.152: IC1.19 89.31,21.46 88.24,21.46 77.04,10.26 77.04,8.96 X2.4
LD_/C  (via drill 0.38)
  Top 0.152: IC5.29 64.55,29.39 58.07,22.91 54.49,22.91 v54.41,22.99 | v48.01,22.6 48.01,23.37 v47.55,23.82 | v34.07,32.74 31.78,32.74 30.87,33.65 29.95,33.65 25.84,37.77 25.84,40.28 26.83,41.27 v26.83,51.64
  Bottom 0.152: v54.41,22.99 48.85,22.99 48.47,22.6 v48.01,22.6 | v47.55,23.82 42.98,23.82 v34.07,32.74 | v26.83,51.64 26.83,54.99 26.52,55.29 26.52,56.67 28.58,58.72 28.58,59.03 28.88,59.33 29.49,59.33 X1.9
LDIN
  Top 0.152: IC1.15 89.31,26.57 87.63,26.57 75.44,14.38 75.44,8.96 X2.2
LEDK1
  Bottom 0.152: R37.2 22.71,53.47 22.71,51.18 23.86,50.04 23.86,49.43 27.97,45.31 29.49,45.31 X1.37
LEDK2  (via drill 0.38)
  Top 0.152: v14.41,44.02 12.96,44.02 R38.2 | v16.31,45.92 19.51,45.92 21.57,47.98 v24.46,47.98
  Bottom 0.152: v16.31,45.92 v14.41,44.02 | v24.46,47.98 24.85,47.98 27.97,44.86 29.49,44.86 X1.38
LEDK3
  Bottom 0.152: R39.2 29.42,44.25 29.49,44.32 X1.39
LEDK4
  Bottom 0.152: R40.2 24.54,41.73 25.61,41.73 27.67,43.79 29.49,43.79 X1.40
LHVTRIG  (via drill 0.38)
  Top 0.152: v63.25,9.65 63.56,9.96 63.56,14.68 68.2,19.33 68.2,26.72 66.22,28.7 65.38,28.7 IC5.30 | v109.12,28.78 110.11,28.78 110.49,28.4 R13.1
  Bottom 0.152: v63.25,9.65 73.08,9.65 73.16,9.57 74.07,9.57 78.8,14.3 91.29,14.3 105.77,28.78 v109.12,28.78
LLED  (via drill 0.38)
  Top 0.152: R44.1 17.07,43.94 16.92,43.79 16.92,41.5 R42.1 17,41.5 17.84,40.66 19.59,40.66 20.35,41.43 20.65,41.43 R43.1 20.65,41.35 20.65,40.66 v20.96,40.36 | v71.94,29.84 71.94,30.61 72.62,31.29 73,31.29 IC5.13 | v63.1,28.78 57.54,23.21 57.08,23.21 55.17,25.12 55.17,30.15 v54.49,30.83 | v47.63,30.07 47.1,29.54 v40.01,29.54 | v37.42,32.13 31.93,32.13 30.71,33.35 28.88,33.35 23.32,38.91 | 23.32,38.91 22.71,39.52 R41.1 | 23.32,38.91 v22.86,38.45
  Bottom 0.152: v71.94,29.84 69.19,29.84 68.13,28.78 v63.1,28.78 | v54.49,30.83 48.39,30.83 v47.63,30.07 | v37.42,32.13 v40.01,29.54 | v22.86,38.45 v20.96,40.36
LOPA  (via drill 0.38)
  Top 0.152: IC6.3 61.12,5 62.95,3.17 67.06,3.17 67.14,3.25 69.04,3.25 70.18,4.39 72.85,4.39 72.93,4.32 79.18,4.32 81.92,7.06 81.92,10.34 83.14,11.56 87.79,11.56 95.1,18.87 98.76,18.87 R20.1 98.84,18.95 99.6,19.71 v99.6,21.77 | v113.24,29.01 114.53,29.01 H1.3
  Bottom 0.152: v113.24,29.01 110.19,29.01 106.91,25.73 103.56,25.73 v99.6,21.77
LRD  (via drill 0.38)
  Top 0.152: IC5.10 72.7,29.39 71.94,28.62 v71.94,27.56 | v64.32,26.26 64.32,25.42 56.24,17.35 56.24,13.23 v54.79,11.78 | v13.49,59.64 16.16,59.64 20.27,55.52 v27.13,55.52
  Bottom 0.152: v71.94,27.56 65.61,27.56 v64.32,26.26 | v54.79,11.78 36.2,11.78 20.88,27.1 16.39,27.1 7.09,36.4 7.09,53.24 v13.49,59.64 | v27.13,55.52 27.13,56.59 28.81,58.27 29.49,58.27 X1.11
LRESET  (via drill 0.38)
  Top 0.152: v56.7,24.43 63.56,31.29 65.31,31.29 IC5.26 | v48.62,22 48.62,23.6 47.78,24.43 v44.43,24.43 | v31.09,36.55 31.09,42.19 28.96,44.32 28.96,49.58 27.74,50.8 27.74,53.24 v26.22,54.76
  Bottom 0.152: v56.7,24.43 54.64,22.38 49,22.38 v48.62,22 | v44.43,24.43 43.21,24.43 34.29,33.35 33.15,33.35 31.09,35.41 v31.09,36.55 | v26.22,54.76 26.22,56.82 28.27,58.88 28.27,59.79 28.81,60.32 29.49,60.32 X1.7
LTS+  (via drill 0.38)
  Top 0.152: X5.4 84.59,10.57 91.98,10.57 X5.1 92.05,10.57 96.09,14.6 98.68,14.6 R12.2 98.68,14.68 v99.6,15.59
  Bottom 0.152: v99.6,15.59 100.21,16.2 100.21,21.92 103.71,25.42 107.07,25.42 108.97,27.33 118.19,27.33 122.61,22.91 122.61,18.87 121.7,17.96 121.7,9.5 F1.P$4
LTS-
  Top 0.152: X5.3 84.59,1.73 91.98,1.73 X5.2 92.05,1.73 92.44,2.11 92.44,8.13 97.16,12.85 98.68,12.85 R12.1 100.21,14.45 100.21,23.98 105.16,28.93 106.23,28.93 109.05,26.11 113.31,26.11 115.68,28.47 115.68,31.22 118.72,34.26 125.05,34.26 125.28,34.03 125.28,28.55 121.7,24.97 121.7,19.63 F1.P$3
LVSEL
  Top 0.152: IC5.14 73.08,31.98 77.96,31.98 78.41,32.43 88.55,32.43 89.31,31.67 IC1.11
LWR  (via drill 0.38)
  Top 0.152: v74.07,28.78 73.08,28.78 IC5.9 | v70.57,29.23 70.57,30.76 67.29,34.03 67.29,35.25 65.08,37.46 v40.92,37.46
  Bottom 0.152: v74.07,28.78 71.02,28.78 v70.57,29.23 | v40.92,37.46 38.87,35.41 34.07,35.41 32.62,36.85 32.62,37.54 31.86,38.3 31.55,38.3 31.4,38.45 31.4,41.88 32.01,42.49 32.01,57.05 30.26,58.8 29.57,58.8 X1.10
N$1  (via drill 0.38)
  Top 0.152: R1.1 97.08,50.34 94.8,48.06 94.49,48.06 93.58,47.14 v93.58,31.75 | v93.04,24.36 93.04,24.05 95.56,21.54 96.02,21.54 IC1.2
  Bottom 0.152: v93.58,31.75 93.58,24.89 v93.04,24.36
N$2
  Top 0.152: R2.1 96.25,25.12 96.09,25.27 IC1.5
N$3
  Top 0.152: R3.1 99.29,29.92 99.29,29.39 96.55,26.64 96.09,26.64 IC1.6
N$4
  Top 0.152: R4.1 101.58,33.43 101.58,32.51 99.75,30.68 96.32,30.68 96.09,30.45 IC1.9
N$5
  Top 0.152: R5.1 111.49,44.86 110.27,44.86 109.43,45.69 108.44,45.69 107.68,44.93 107.68,44.47 106.76,43.56 104.4,43.56 104.09,43.25 104.09,39.06 97.39,32.36 97.39,31.29 97.24,31.14 91.29,31.14 90.61,30.45 89.39,30.45 IC1.12
N$6
  Top 0.152: T8.1 97.31,65.2 98.38,66.27 105.39,66.27 106.99,64.67 106.99,63.37 109.81,60.55 112.32,60.55 SG1.-
N$7
  Top 0.152: T4.3 108.89,45.01 107.6,43.71 107.52,43.71 105.31,41.5 105.31,38.91 101.66,35.25 R4.2
N$8
  Top 0.152: T5.3 113.47,41.2 111.56,43.1 R5.2
N$9
  Top 0.152: 105.58,26.83 102.65,23.9 102.65,19.63 F1.P$1 | 105.58,26.83 105.62,26.87 105.62,28.32 D2.A | 105.58,26.83 105.62,26.8 107.9,26.8 108.89,25.81 116.36,25.81 121.85,31.29 H1.4
N$10
  Top 0.152: R7.1 97.46,54.15 T1.1
N$11
  Top 0.152: T2.1 110.88,41.2 111.56,40.51 117.05,40.51 120.32,43.79 120.32,45.31 121.39,46.38 121.7,46.38 121.85,46.53 121.85,49.2 121.09,49.96 R8.1
N$12
  Top 0.152: T3.1 123.22,54.76 121.09,52.63 R9.1
N$13
  Top 0.152: T1.3 99.45,50.49 99.29,50.34 R1.2
N$14
  Top 0.152: T2.3 108.21,39.14 108.21,36.02 99.06,26.87 R2.2
N$15  (via drill 0.38)
  Top 0.152: v114.46,47.14 118.57,47.14 119.18,47.75 119.18,52.32 122.76,55.9 122.84,55.9 124.13,57.2 T3.3 | v107.37,40.05 107.37,39.52 102.11,34.26 100.97,34.26 99.37,32.66 99.37,31.67 R3.2
  Bottom 0.152: v107.37,40.05 v114.46,47.14
N$16
  Top 0.152: T4.1 107.98,43.03 109.96,43.03 111.03,44.09 112.7,44.09 115.45,46.84 120.71,46.84 121.01,47.14 R10.1
N$17
  Top 0.152: 103.79,54.15 103.79,50.34 C1.2 | 122.76,44.63 122.76,47.14 R10.2 122.76,47.22 122.76,49.96 | 122.76,49.96 122.76,52.63 R9.2 122.84,52.63 124.82,54.61 124.82,57.73 124.67,57.89 116.97,57.89 113.24,54.15 103.79,54.15 | 122.76,49.96 R8.2 | IC7.7 121.92,43.79 122.76,44.63 | 122.76,44.63 R11.2 | 103.79,54.15 R7.2
N$18  (via drill 0.38)
  Top 0.152: 101.96,50.34 101.96,46.53 C5.1 | 121.96,39.71 123.68,38 124.52,38 125.05,37.46 125.05,35.1 124.9,34.95 121.54,34.95 120.71,35.79 120.71,36.24 IC7.1 120.63,36.32 118.95,36.32 C6.1 118.88,36.32 117.73,35.18 114.53,35.18 108.21,28.85 108.21,28.4 D2.C 108.21,28.32 109.28,27.25 v109.28,26.72 | 121.96,39.71 121.39,40.28 121.39,42.57 121.09,42.87 121.09,44.63 R11.1 | 101.96,50.34 101.96,52.7 102.95,53.69 102.95,54.76 106.38,58.19 124.82,58.19 125.12,57.89 125.12,45.24 122.46,42.57 122.46,40.21 121.96,39.71 | 101.96,50.34 C1.1
  Bottom 0.152: v109.28,26.72 107.68,25.12 103.87,25.12 101.66,22.91 101.66,18.87 102.57,17.96 102.57,9.5 F1.P$2
N$19
  Top 0.152: 8.81,28.28 5.8,31.29 H2.4 | 8.81,28.28 8.84,28.24 13.95,28.24 14.79,29.08 15.09,29.08 D1.A | 8.81,28.28 5.11,24.59 5.11,19.86 F2.P$1
N$20  (via drill 0.38)
  Top 0.152: v8.62,44.32 8.62,45.46 R15.1 | v38.18,19.4 38.56,19.4 39.32,18.64 v47.32,18.64 | v53.34,18.95 53.34,22.76 53.95,23.37 53.95,24.2 53.12,25.04 52.66,25.04 IC2.2
  Bottom 0.152: v8.62,44.32 8.62,43.94 12.58,39.98 12.58,32.74 15.78,29.54 26.98,29.54 33.46,23.06 35.13,23.06 38.18,20.01 v38.18,19.4 | v47.32,18.64 53.04,18.64 v53.34,18.95
N$21
  Top 0.152: R13.2 112.25,28.4 112.25,31.22 114.53,33.5 H1.1
N$22
  Top 0.152: T8.3 95.03,63.22 95.79,63.22 98,65.43 100.06,65.43 R14.2
N$24  (via drill 0.38)
  Top 0.152: v13.49,46.84 12.96,47.37 12.96,50.34 R16.1 | v26.29,31.29 v19.51,38.07 | v32.69,31.29 33.3,30.68 50.3,30.68 52.05,28.93 52.58,28.93 IC2.5
  Bottom 0.152: v13.49,46.84 13.49,44.09 v19.51,38.07 | v32.69,31.29 v26.29,31.29
N$25  (via drill 0.38)
  Top 0.152: v10.22,49.88 8.54,49.88 R17.1 | v14.86,49.88 22.03,49.88 23.63,51.48 24.08,51.48 25.38,50.19 v25.38,40.66 | v28.2,37.39 28.96,37.39 31.78,34.57 42.3,34.57 44.81,32.05 49.76,32.05 51.67,30.15 IC2.6
  Bottom 0.152: v14.86,49.88 v10.22,49.88 | v25.38,40.66 25.38,38.23 26.22,37.39 v28.2,37.39
N$26  (via drill 0.38)
  Top 0.152: v49.84,16.2 49.84,22.76 51.21,24.13 51.21,25.42 51.59,25.81 54.11,25.81 54.87,26.57 54.87,29.62 53.65,30.83 51.44,30.83 51.21,31.06 51.21,31.75 51.59,32.13 53.8,32.13 53.95,32.28 53.95,33.12 53.12,33.96 IC2.9
  Bottom 0.152: v49.84,16.2 49.38,15.75 43.06,15.75 35.44,23.37 33.61,23.37 27.13,29.84 15.93,29.84 12.88,32.89 12.88,47.06 18.75,52.93 18.75,57.05 R18.1
N$27  (via drill 0.38)
  Top 0.152: v19.66,59.64 14.25,65.05 12.96,65.05 R19.1 | v26.22,53.08 27.44,51.87 27.44,40.44 27.13,40.13 27.13,39.67 31.93,34.87 44.58,34.87 45.5,33.96 IC2.12
  Bottom 0.152: v26.22,53.08 v19.66,59.64
N$28  (via drill 0.38)
  Top 0.152: v24.16,47.14 22.18,47.14 v20.96,45.92 | v18.14,44.47 17.84,44.78 16.24,44.78 15.47,44.02 R44.2
  Bottom 0.152: v24.16,47.14 24.46,46.84 24.46,46.15 T13.3 | v20.96,45.92 19.59,45.92 v18.14,44.47
N$29
  Top 0.152: T6.3 10.9,45.92 9.61,45.92 9.22,46.3 7.7,46.3 6.94,45.54 R15.2
N$30
  Top 0.152: T7.3 13.19,53.85 13.03,53.85 11.28,52.09 11.28,50.34 R16.2
N$31
  Top 0.152: T9.3 8.39,55.98 11.21,55.98 11.59,56.36 12.58,56.36 12.73,56.21 12.73,54.61 11.89,53.77 11.89,53.31 9.22,50.65 7.55,50.65 6.79,49.88 R17.2
N$32  (via drill 0.38)
  Top 0.152: v16.01,57.66 13.11,57.66 T10.3
  Bottom 0.152: v16.01,57.66 16.46,57.66 17,57.12 R18.2
N$33
  Top 0.152: T11.3 13.03,62.84 13.03,63.3 11.28,65.05 R19.2
N$35
  Top 0.152: T6.1 11.89,47.9 11.89,45.62 11.05,44.78 10.6,44.78 10.29,44.47 10.29,38.99 10.37,38.91 R22.1
N$36
  Top 0.152: T7.1 12.2,51.87 12.2,51.03 11.97,50.8 11.97,49.66 9.91,47.6 8.39,47.6 R23.1
N$37
  Top 0.152: T9.1 6.41,56.89 6.41,56.06 7.55,54.91 7.55,52.63 6.79,51.87 R24.1
N$38
  Top 0.152: T10.1 9.91,55.68 8.54,54.3 R25.1
N$39
  Top 0.152: 6.37,50.84 6.56,51.03 7.62,51.03 8.46,51.87 R24.2 | 6.37,50.84 6.02,50.49 6.02,49.2 6.63,48.59 6.63,47.6 R23.2 6.63,47.52 6.63,46.68 5.49,45.54 5.49,43.03 4.5,42.04 4.5,41.58 IC8.7 4.5,41.5 4.5,40.97 6.56,38.91 R22.2 9.53,38.07 14.18,38.07 | 6.37,50.84 6.02,51.18 6.02,52.55 6.71,53.24 6.71,54.23 R25.2 | 14.18,38.07 14.18,36.85 13.72,36.4 C2.2 | 14.18,38.07 14.18,38.91 R26.2
N$40
  Top 0.152: C8.1 30.1,19.4 30.1,23.82 29.87,24.05 C7.1 23.93,24.05 18.83,29.16 17.76,29.16 D1.C 17.68,29.16 17.68,30.61 18.37,31.29 18.37,32.59 15.63,35.33 14.94,35.33 | 14.94,35.33 12.81,35.33 11.82,36.32 C2.1 11.74,36.32 10.37,34.95 4.04,34.95 3.62,35.37 | R26.1 12.81,38.91 13.64,39.75 14.79,39.75 14.94,39.6 14.94,35.33 | 3.62,35.37 3.2,35.79 3.2,36.24 IC8.1 | 3.62,35.37 2.37,34.11 2.37,20.85 5.03,18.19 5.03,9.73 F2.P$2
N$41
  Bottom 0.152: T12.1 23.55,52.02 23.55,52.7 24.31,53.47 R37.1
N$42
  Top 0.152: R21.2 15.85,31.9 13.03,29.08 H2.1
N$43
  Top 0.152: T15.1 11.89,42.65 11.89,43.33 11.28,43.94 R38.1
N$44  (via drill 0.38)
  Top 0.152: v21.72,44.32 20.81,45.24 20.05,45.24 T14.1
  Bottom 0.152: v21.72,44.32 22.64,44.32 22.71,44.25 R39.1
N$45
  Top 0.152: T5.1 113.09,39.14 113.77,39.14 115.22,37.69 123.6,37.69 124.44,36.85 124.44,36.32 IC7.4
N$46
  Bottom 0.152: T13.1 23.55,48.13 23.55,42.49 22.79,41.73 R40.1
N$47
  Top 0.152: T11.1 12.04,60.7 8.23,60.7 3.13,55.6 3.13,43.33 3.89,42.57 3.89,39.9 6.94,36.85 6.94,36.32 IC8.4
N$48
  Top 0.152: T14.3 19.05,43.18 19.05,41.58 18.98,41.5 R43.2
N$49  (via drill 0.38)
  Top 0.152: v23.86,50.87 23.86,49.43 25.07,48.21 25.07,41.2 24.39,40.51 24.39,39.6 R41.2
  Bottom 0.152: v23.86,50.87 24.46,50.27 24.46,49.96 T12.3
N$50
  Top 0.152: T15.3 10.98,40.59 11.74,40.59 12.58,41.43 15.09,41.43 R42.2
N$52
  Top 0.152: R31.1 68.58,5 | 68.58,5 R32.2 | IC6.6 68.58,5
N$54
  Top 0.152: R30.2 58.22,4.01 58.22,5.99 R29.1 58.3,5.99 60.35,5.99 60.58,6.22 IC6.2
RADC
  Top 0.152: IC5.27 67.9,30.68 68.51,30.07 68.51,19.18 63.86,14.53 63.86,7.75 65.31,6.3 65.84,6.3 IC6.7 65.92,6.3 66.37,6.3 67.82,7.75 68.58,7.75 R31.2
RCLOCK
  Top 0.152: IC2.16 45.88,28.85 45.42,28.85 43.82,27.25 43.82,22.99 48.92,17.88 48.92,12.93 50.91,10.95 50.91,8.96 X4.3
RCLR
  Top 0.152: IC2.19 45.95,25.04 47.63,25.04 49.23,23.44 49.23,13.08 51.67,10.64 51.67,8.96 X4.4
RDIN  (via drill 0.38)
  Top 0.152: IC2.15 39.78,30.15 37.49,27.86 v37.49,22.76 | v42.07,18.03 43.36,18.03 50.22,11.17 50.22,9.04 50.14,8.96 X4.2
  Bottom 0.152: v37.49,22.76 37.49,22.6 v42.07,18.03
RHVTRIG  (via drill 0.38)
  Top 0.152: v64.47,14.3 68.81,18.64 68.81,21 72.62,24.81 73,24.81 IC5.3 | v17.68,28.01 17,28.7 17,31.29 17.61,31.9 R21.1
  Bottom 0.152: v64.47,14.3 62.41,14.3 60.51,12.39 36.05,12.39 20.43,28.01 v17.68,28.01
ROPA  (via drill 0.38)
  Top 0.152: R28.1 30.48,31.82 31.32,30.99 31.32,29.23 v31.17,29.08 | v14.41,33.35 13.26,33.35 13.11,33.5 H2.3 | v56.93,13 62.03,7.9 62.03,7.06 65.31,3.78 65.84,3.78 IC6.5
  Bottom 0.152: v14.41,33.35 16.92,33.35 19.97,30.3 27.13,30.3 28.35,29.08 v31.17,29.08 31.17,28.09 43.21,16.05 48.85,16.05 49.61,16.81 50.07,16.81 52.13,14.76 52.51,14.76 54.26,13 v56.93,13
RTS+
  Top 0.152: F2.P$4 28.05,13.61 28.05,13.92 R27.2 28.05,13.54 32.24,13.54 35.21,10.57 X3.4 35.29,10.57 42.68,10.57 X3.1
RTS-
  Top 0.152: F2.P$3 24.16,19.86 28.05,15.98 28.05,15.67 R27.1 28.12,15.59 35.89,15.59 39.93,11.56 44.12,11.56 44.28,11.4 44.28,3.4 42.68,1.8 X3.2 42.68,1.73 35.29,1.73 X3.3
RVSEL
  Top 0.152: IC5.25 65.38,32.05 65.99,32.05 66.98,33.04 66.98,35.1 64.93,37.16 47.86,37.16 45.95,35.25 IC2.11
SPKR  (via drill 0.38)
  Top 0.152: v77.88,30.68 73.08,30.68 IC5.12 | v94.19,33.58 94.19,36.55 93.88,36.85 93.88,45.24 v94.26,45.62 | v97.62,58.34 97.62,61.77 100.51,64.67 101.05,64.67 101.81,65.43 R14.1
  Bottom 0.152: v77.88,30.68 79.71,30.68 86.64,23.75 93.27,23.75 94.19,24.66 v94.19,33.58 | v94.26,45.62 94.26,47.52 97.62,50.87 v97.62,58.34
TCK  (via drill 0.38)
  Top 0.152: v65.23,19.71 62.95,22 62.95,23.44 64.93,25.42 65.31,25.42 IC5.35 | v67.21,12.93 66.15,12.93 65.46,13.61 SV1.3
  Bottom 0.152: v65.23,19.71 65.61,19.71 67.67,17.65 67.67,15.9 SV1.3 | v67.21,12.93 70.72,12.93 76.89,19.1 89.54,19.1 106.91,36.47 106.91,37.54 S5.4
TDI
  Top 0.152: IC5.37 65.38,24.13 65.84,24.13 66.45,23.52 66.45,20.09 64.16,17.8 62.41,17.8 60.35,15.75 60.35,13.69 SV1.5
  Bottom 0.152: S7.4 49.31,16.97 49.46,17.12 50.37,17.12 52.43,15.06 58.91,15.06 SV1.5
TDO  (via drill 0.38)
  Top 0.152: v63.86,22.38 65,23.52 65.31,23.52 IC5.38
  Bottom 0.152: v63.86,22.38 63.86,16.2 60.66,13 58.45,13 57.84,13.61 SV1.6
TEST
  Top 0.152: SV1.1 70.49,21 73,23.52 IC5.1
TMS  (via drill 0.38)
  Top 0.152: v65.84,20.32 65.08,20.32 63.25,22.15 63.25,23.14 64.93,24.81 65.31,24.81 IC5.36 | v63.25,16.43 63.25,14.07 62.87,13.69 SV1.4
  Bottom 0.152: v65.84,20.32 65.84,19.94 67.97,17.8 67.97,15.29 65.69,13 63.48,13 62.87,13.61 SV1.4 | v63.25,16.43 63.25,17.42 62.87,17.8 62.41,17.8 62.11,17.5 57.61,17.5 55.55,19.56 41.53,19.56 30.48,30.61 26.14,30.61 18.6,38.15 16.16,38.15 S6.4
VBAT  (via drill 0.38)
  Top 0.152: v67.67,30.07 65.38,30.07 IC5.28 | v97.46,37.77 101.12,41.43 101.12,42.72 R46.2 R45.1
  Bottom 0.152: v67.67,30.07 68.05,30.07 69.58,31.6 81.54,31.6 81.92,31.22 89.62,31.22 96.17,37.77 v97.46,37.77
VCC  (via drill 0.38)
  Top 0.305: v49.61,10.95 49.38,10.72 49.38,8.96 X4.1 | v73.39,10.18 74.6,8.96 X2.1 | v118.5,46.23 118.5,43.71 IC3.3 | C10.1 108.13,64.29 115.07,64.29 118.8,60.55 SG1.+
  Bottom 0.305: v49.61,10.95 72.62,10.95 v73.39,10.18 73.46,10.26 74.15,10.26 82.61,18.72 90.45,18.72 110.49,38.76 110.49,39.52 117.12,46.15 118.42,46.15 v118.5,46.23 118.5,60.17 SG1.+
XIN
  Top 0.152: IC5.6 73.08,26.8 76.59,26.8 Q3.2 78.11,28.4 79.02,29.31 79.02,31.29 C12.1
XOUT
  Top 0.152: 78.11,26.57 77.73,26.19 73.08,26.19 IC5.5 | 78.11,26.57 80.62,26.57 C11.1 | 78.11,26.57 Q3.1

## Text on the board
tDocu: eTapper Main R54
DrillLegend: LAYER-STACK
DrillLegend_01-16: 01-16
DrillLegend_01-20: 01-20